# EAGLE board max7219_slim (EAGLE 6.1)
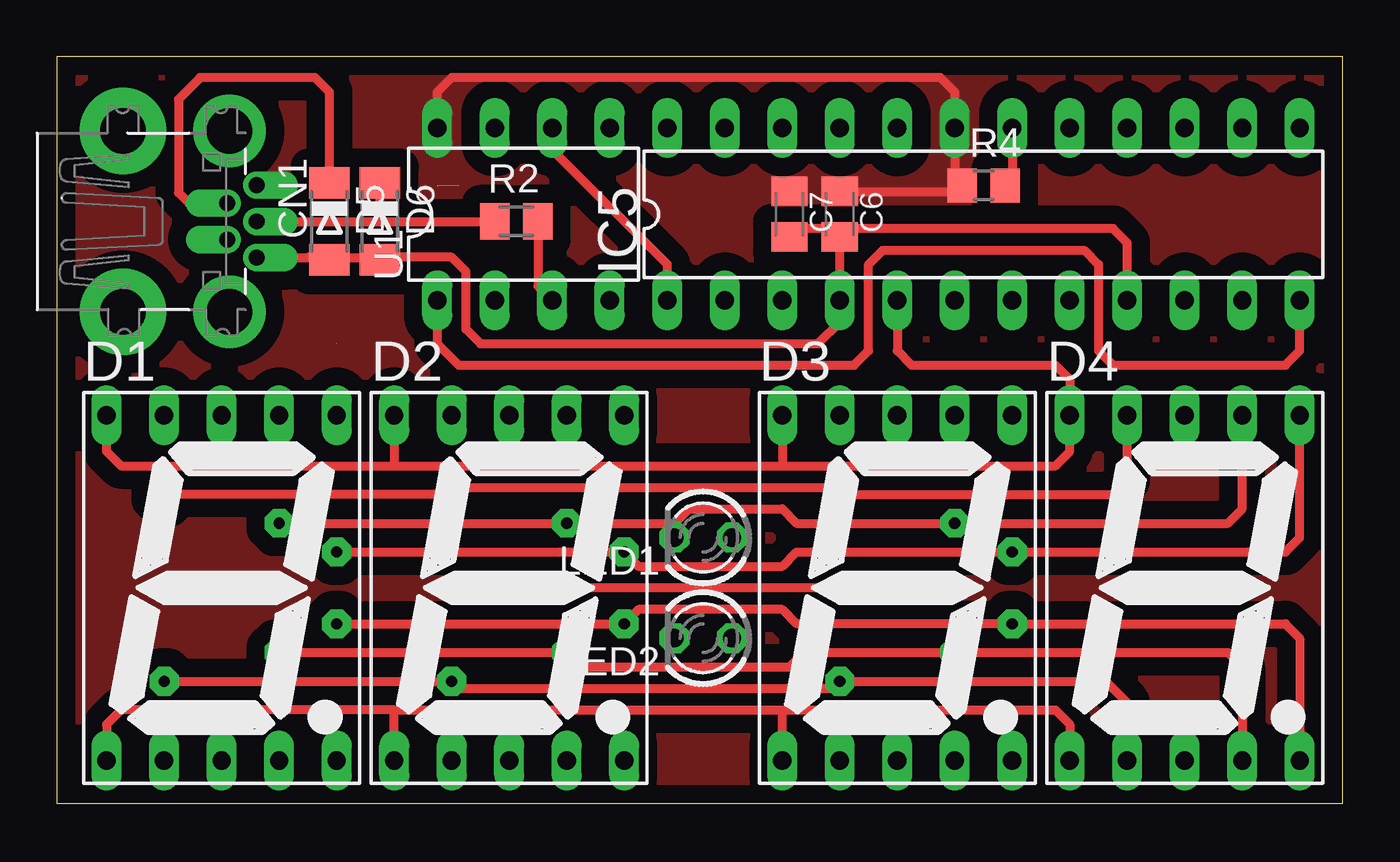
[diagram p0: board, top side]
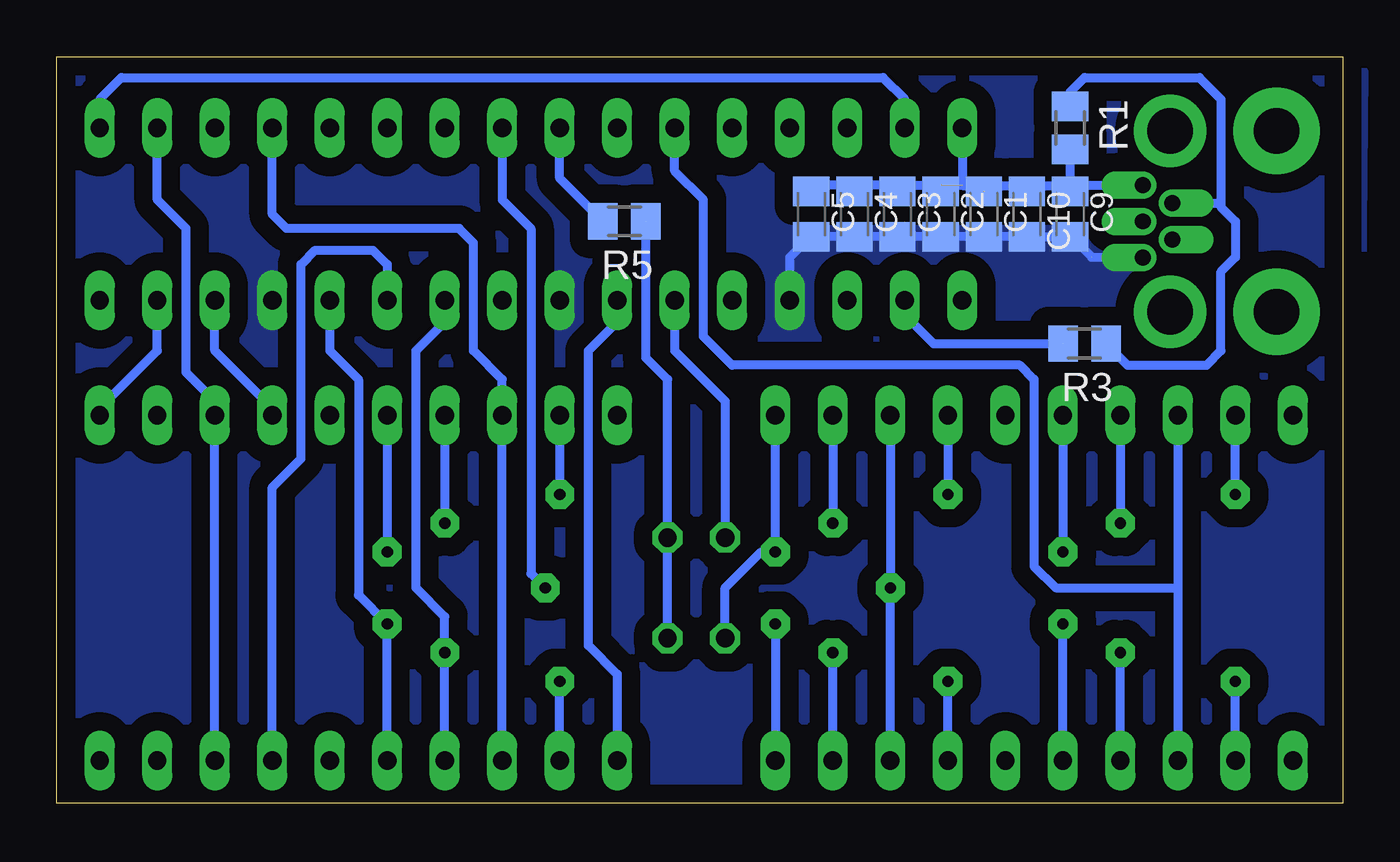
[diagram p1: board, bottom side, seen from below]

Size 56.82 x 33 mm. Coordinates in mm from the lower left corner, seen from the top.
Outline: 56.82,0 56.82,33 0,33 0,0 56.82,0
Copper layers (1*16): Top 0.035mm / dielectric 1.5mm / Bottom 0.035mm
Design rules: minimum track width 10mil, minimum drill 24mil, track to track 12mil, track to pad 12mil, pad to pad 12mil, via to via 12mil, smd to smd 10mil, copper to edge 12mil, drill to drill 12mil, minimum pad ring 10mil, minimum via ring 10mil, stop-mask expansion 4mil, vias tented up to drill 0mil, thermal gap 12mil

## Footprints (pad centres in the part's own frame; a part is rotated, then mirrored left to right if it is on the bottom)
C0805K = smd 1.3 x 1.6: 1 -1,0; 2 1,0
USB-MINIB-THM = drill 0.7 offset: D+ 0,9.8; D- -0.8,8.5; GND 1.6,9.8; ID 0.8,8.5; VBUS -1.6,9.8 | drill 2 pad 3.81: GND1 -4,3.9; GND4 4,3.9 | drill 2 pad 3.2: GND2 -4,8.6; GND3 4,8.6
7SEG-13 = drill 0.813 long: 1 -5.08,-7.62; 2 -2.54,-7.62; 3 0,-7.62; 4 2.54,-7.62; 5 5.08,-7.62; 6 5.08,7.62; 7 2.54,7.62; 8 0,7.62; 9 -2.54,7.62; 10 -5.08,7.62
MINIMELF = smd 1.4 x 1.8: A 1.7,0; C -1.7,0
DIL24-3 = drill 0.813 long: 1 -13.97,-3.81; 2 -11.43,-3.81; 3 -8.89,-3.81; 4 -6.35,-3.81; 5 -3.81,-3.81; 6 -1.27,-3.81; 7 1.27,-3.81; 8 3.81,-3.81; 9 6.35,-3.81; 10 8.89,-3.81; 11 11.43,-3.81; 12 13.97,-3.81; 13 13.97,3.81; 14 11.43,3.81; 15 8.89,3.81; 16 6.35,3.81; 17 3.81,3.81; 18 1.27,3.81; 19 -1.27,3.81; 20 -3.81,3.81; 21 -6.35,3.81; 22 -8.89,3.81; 23 -11.43,3.81; 24 -13.97,3.81
LED3MM = drill 0.813 octagon: A -1.27,0; K 1.27,0
M0805 = smd 1.3 x 1.6: 1 -0.95,0; 2 0.95,0
R0805 = smd 1.3 x 1.5: 1 -0.95,0; 2 0.95,0
DIL08 = drill 0.813 long: 1 -3.81,-3.81; 2 -1.27,-3.81; 3 1.27,-3.81; 4 3.81,-3.81; 5 3.81,3.81; 6 1.27,3.81; 7 -1.27,3.81; 8 -3.81,3.81

## Placement (x,y rotation side)
C1  u1  [C0805K]  15.86,26.04 270 bottom
C2  u1  [C0805K]  17.77,26.04 270 bottom
C3  u1  [C0805K]  19.67,26.04 270 bottom
C4  u1  [C0805K]  21.58,26.04 270 bottom
C5  u1  [C0805K]  23.48,26.04 270 bottom
C6  u1  [C0805K]  34.59,26.04 270 top
C7  u1  [C0805K]  32.37,26.04 270 top
C9  u1  [C0805K]  12.05,26.04 270 bottom
C10  u1  [C0805K]  13.96,26.04 270 bottom
CN1  [USB-MINIB-THM]  -0.96,25.72 270 top
D1  [7SEG-13]  7.29,9.53 0 top
D2  [7SEG-13]  19.99,9.53 0 top
D3  [7SEG-13]  37.13,9.53 0 top
D4  [7SEG-13]  49.83,9.53 0 top
D5  3v6  [MINIMELF]  12.05,25.72 270 top
D6  3v6  [MINIMELF]  14.28,25.72 270 top
IC5  MAX7219CNG  [DIL24-3]  40.95,26.04 0 top
LED1  [LED3MM]  28.56,11.75 180 top
LED2  [LED3MM]  28.56,7.3 180 top
R1  1k5  [M0805]  12.05,29.84 270 bottom
R2  33  [M0805]  20.31,25.72 0 top
R3  33  [M0805]  11.42,20.32 180 bottom
R4  [R0805]  40.95,27.3 0 top
R5  33  [M0805]  31.74,25.72 180 bottom
U1  [DIL08]  20.62,26.04 0 top

## Library data of the parts
C1-C7 C9 C10 R1-R5 = rcl
CN1 = adafruit
D1-D4 = special
D5 D6 = diode
IC5 = maxim; MF: MAXIM; MPN: MAX7219CNG; OC_FARNELL: 1523914; OC_NEWARK: 34C4018
LED1 LED2 = led
U1 = _MY_OWN_LIB

## Nets
+5V: C1.1 C2.1 C3.1 C4.1 C5.1 C6.1 C7.1 C9.1 C10.1 CN1.VBUS IC5.19 R1.2 R4.1 U1.8
CLK: IC5.13 U1.7
DAT: IC5.1 U1.6
GND: C1.2 C2.2 C3.2 C4.2 C5.2 C6.2 C7.2 C9.2 C10.2 CN1.GND D5.A D6.A IC5.4 IC5.9 U1.4
LAT: IC5.12 U1.1
N$1: D2.3 D2.8 IC5.20
N$2: D4.3 D4.8 IC5.14
N$3: D1.3 D1.8 IC5.23
N$4: LED1.A LED2.A R5.1
N$5: D1.7 D2.7 D3.7 D4.7 IC5.2 LED1.K
N$6: D1.6 D2.6 D3.6 D4.6 IC5.11 LED2.K
N$7: D1.4 D2.4 D3.4 D4.4 IC5.6
N$8: D1.2 D2.2 D3.2 D4.2 IC5.7
N$9: D1.1 D2.1 D3.1 D4.1 IC5.3
N$10: D1.9 D2.9 D3.9 D4.9 IC5.10
N$11: D1.10 D2.10 D3.10 D4.10 IC5.5
N$12: D1.5 D2.5 D3.5 D4.5 IC5.8
N$13: IC5.18 R4.2
N$14: D3.3 D3.8 IC5.16
N$15: IC5.21 R5.2
N$46: R2.2 U1.3
N$47: CN1.D- D5.C R1.1 R3.1
N$48: CN1.D+ D6.C R2.1
N$49: R3.2 U1.2

## Tracks (layer width: path | path; a pad name or v marks a point on that pad's centre or on a via)
+5V  (2 unrouted)
  Top 0.406: U1.8 16.82,31.43 17.45,32.07 39.04,32.07 39.68,31.43 IC5.19 39.68,27.62 | 39.68,27.62 R4.1 | C6.1 39.63,27.04 | 39.63,27.04 39.68,26.99 | 39.68,27.62 39.68,27.08 39.63,27.04
  Bottom 0.406: 12.05,27.3 C9.1 | 19.67,27.32 17.77,27.32 | 17.77,27.32 15.83,27.32 15.83,27.02 15.86,26.99 | C9.1 12.32,27.3 13.96,27.3 C10.1 14.23,27.3 16.82,27.3 U1.8 | 19.67,27.32 21.58,27.32 | 21.58,27.32 23.47,27.32 23.48,27.3 C5.1 | C4.1 21.58,27.32 | C3.1 19.67,27.32 | CN1.VBUS 8.86,27.32 8.88,27.3 12.05,27.3 | C9.1 12.05,26.99 | R1.2 12.05,27.3 | C2.1 17.77,27.32
  pour Top (isolate 0.813, no thermals): -0.01,0.32 55.87,0.32 56.18,32.38 -0.01,32.38
CLK
  Bottom 0.406: IC5.13 54.92,31.11 53.96,32.07 20.31,32.07 19.35,31.11 U1.7
DAT
  Top 0.406: IC5.1 26.98,23.81 21.89,28.89 U1.6
GND  (1 unrouted)
  Top 0.406: IC5.9 47.29,24.77 46.66,25.4 34.6,25.4 | 34.6,25.4 C6.2 IC5.4 34.6,21.27 33.64,20.32 18.72,20.32 18.09,20.95 18.09,23.5 17.45,24.13 14.91,24.13 | 34.6,25.4 32.37,25.4 C7.2 | D6.A 14.18,24.12 14.26,24.12 14.27,24.13 14.91,24.13 | CN1.GND 14.9,24.12 14.91,24.13 | D5.A 12.05,24.13 11.1,24.13
  Bottom 0.406: C4.2 C3.2 C2.2 C1.2 C10.2 C9.2 | C4.2 C5.2 | U1.4 24.44,24.13 23.53,25.04 C4.2 | C9.2 12.05,25.08 | C9.2 12.01,25.04 11.1,24.13 8.88,24.13
  pour Bottom (isolate 0.813, no thermals): -0.65,0.32 55.87,0.32 56.18,32.38 -0.96,32.38
LAT
  Top 0.406: U1.1 16.82,20.32 17.77,19.37 35.23,19.37 35.86,20 35.86,23.81 36.5,24.45 45.39,24.45 46.03,23.81 46.03,20 46.66,19.37 54.28,19.37 54.92,20 IC5.12
N$1  (via drill 0.5 pad 1.27)
  Top 0.406: v35.23,9.53 v19.99,9.53
  Bottom 0.406: D2.3 v19.99,9.53 D2.8 | IC5.20 37.14,26.67 35.86,25.4 35.86,10.16 v35.23,9.53
N$2
  Bottom 0.406: D4.3 D4.8 49.83,17.78 51.1,19.05 51.1,25.4 52.38,26.67 IC5.14
N$3
  Bottom 0.406: IC5.23 29.51,27.94 28.25,26.67 28.25,20.64 26.98,19.37 14.27,19.37 13.64,18.73 13.64,10.48 12.69,9.53 7.29,9.53 | D1.8 7.29,9.53 | 7.29,9.53 D1.3
N$4  (1 unrouted)
  Bottom 0.406: LED2.A LED1.A 29.83,18.73 30.78,19.68 R5.1
N$5  (via drill 0.5 pad 1.27)
  Top 0.406: v9.83,12.38 v22.53,12.38 27.29,12.38 | D4.7 52.38,13.02 51.74,12.38 v39.68,12.38 32.69,12.38 32.06,13.02 27.93,13.02 27.29,12.38 | LED1.K 27.29,12.38
  Bottom 0.406: D1.7 v9.83,12.38 | D2.7 v22.53,12.38 | D3.7 v39.68,12.38 | IC5.2 29.51,20 27.29,17.78 LED1.K
N$6  (via drill 0.5 pad 1.27)
  Top 0.406: v12.37,11.11 v25.07,11.11 25.71,10.48 32.06,10.48 32.69,11.11 v42.21,11.11 54.28,11.11 54.92,11.75 D4.6
  Bottom 0.406: D1.6 v12.37,11.11 | D2.6 v25.07,11.11 25.71,11.11 27.29,9.53 LED2.K | D3.6 v42.21,11.11 | D4.6 54.92,17.46 52.38,20 IC5.11
N$7  (via drill 0.5 pad 1.27)
  Top 0.406: v9.83,6.67 v22.53,6.67 23.16,6.03 32.37,6.03 33.01,6.67 v39.68,6.67 51.74,6.67 52.38,6.03 D4.4
  Bottom 0.406: D1.4 v9.83,6.67 | D2.4 v22.53,6.67 | D3.4 v39.68,6.67 39.68,8.26 40.95,9.53 40.95,20 39.68,21.27 IC5.6
N$8  (via drill 0.5 pad 1.27)
  Top 0.406: v4.75,5.4 v17.45,5.4 17.77,5.08 34.28,5.08 v34.6,5.4 46.34,5.4 47.29,4.45 D4.2
  Bottom 0.406: D1.2 v4.75,5.4 | D2.2 v17.45,5.4 | D3.2 v34.6,5.4 | D4.2 47.29,13.97 46.03,15.24 46.03,23.81 45.39,24.45 42.85,24.45 42.21,23.81 IC5.7
N$9
  Top 0.406: 14.91,4.13 32.06,4.13 | D2.1 14.91,4.13 | D3.1 32.06,4.13 | 32.06,4.13 44.12,4.13 44.75,3.49 D4.1 | 14.91,4.13 2.84,4.13 2.21,3.49 D1.1
  Bottom 0.406: D3.1 32.06,5.71 33.32,6.99 33.32,20 32.06,21.27 IC5.3
N$10  (via drill 0.5 pad 1.27)
  Top 0.406: D4.9 47.29,14.29 46.66,13.65 v34.6,13.65 34.28,13.97 17.77,13.97 v17.45,13.65 v4.75,13.65
  Bottom 0.406: D3.9 v34.6,13.65 | D4.9 47.29,17.46 49.83,20 IC5.10 | D2.9 v17.45,13.65 | v4.75,13.65 D1.9
N$11
  Top 0.406: 14.91,14.92 2.84,14.92 2.21,15.56 D1.10 | 14.91,14.92 32.06,14.92 | D2.10 14.91,14.92 | 32.06,14.92 44.12,14.92 44.75,15.56 D4.10 44.75,18.73 44.12,19.37 37.77,19.37 37.14,20 IC5.5 | D3.10 32.06,14.92
N$12  (via drill 0.5 pad 1.27)
  Top 0.406: v12.37,7.94 v25.07,7.94 25.71,8.57 32.06,8.57 32.69,7.94 v42.21,7.94 54.28,7.94 54.92,7.3 D4.5
  Bottom 0.406: D1.5 v12.37,7.94 | v25.07,7.94 D2.5 | D3.5 v42.21,7.94 43.49,9.21 43.49,18.73 44.75,20 IC5.8
N$13
  Top 0.406: IC5.18 42.21,27.62 R4.2
N$14
  Bottom 0.406: D3.3 D3.8 37.14,18.73 38.4,20 38.4,24.77 39.04,25.4 46.66,25.4 47.29,26.04 IC5.16
N$15
  Bottom 0.406: R5.2 34.6,27.62 IC5.21
N$46
  Top 0.406: R2.2 21.26,22.86 U1.3
N$47
  Top 0.406: D5.C 12.05,31.43 11.42,32.07 6.34,32.07 5.38,31.11 5.38,26.99 5.85,26.52 CN1.D-
  Bottom 0.406: R1.1 12.05,31.43 11.42,32.07 6.34,32.07 5.38,31.11 5.38,26.52 | CN1.D- 5.38,26.52 | R3.1 9.51,19.37 6.02,19.37 5.38,20 5.38,23.5 4.75,24.13 4.75,25.72 5.38,26.35 5.38,26.52
N$48  (1 unrouted)
  Top 0.406: CN1.D+ 14.27,25.72 | D6.C 14.27,25.72 | 14.27,25.72 R2.1
N$49  (1 unrouted)
  Bottom 0.406: R3.2 18.09,20.32 19.35,21.59 U1.2